# Altium PCB front pannel.PcbDoc
Units mm, origin at the board's own origin, x right, y up, seen from the top; angles counter-clockwise.
Board outline 79 x 33 mm, 2 copper layers (Top Layer, Bottom Layer); 28 components, 20 nets, 78 pads, 20 vias.
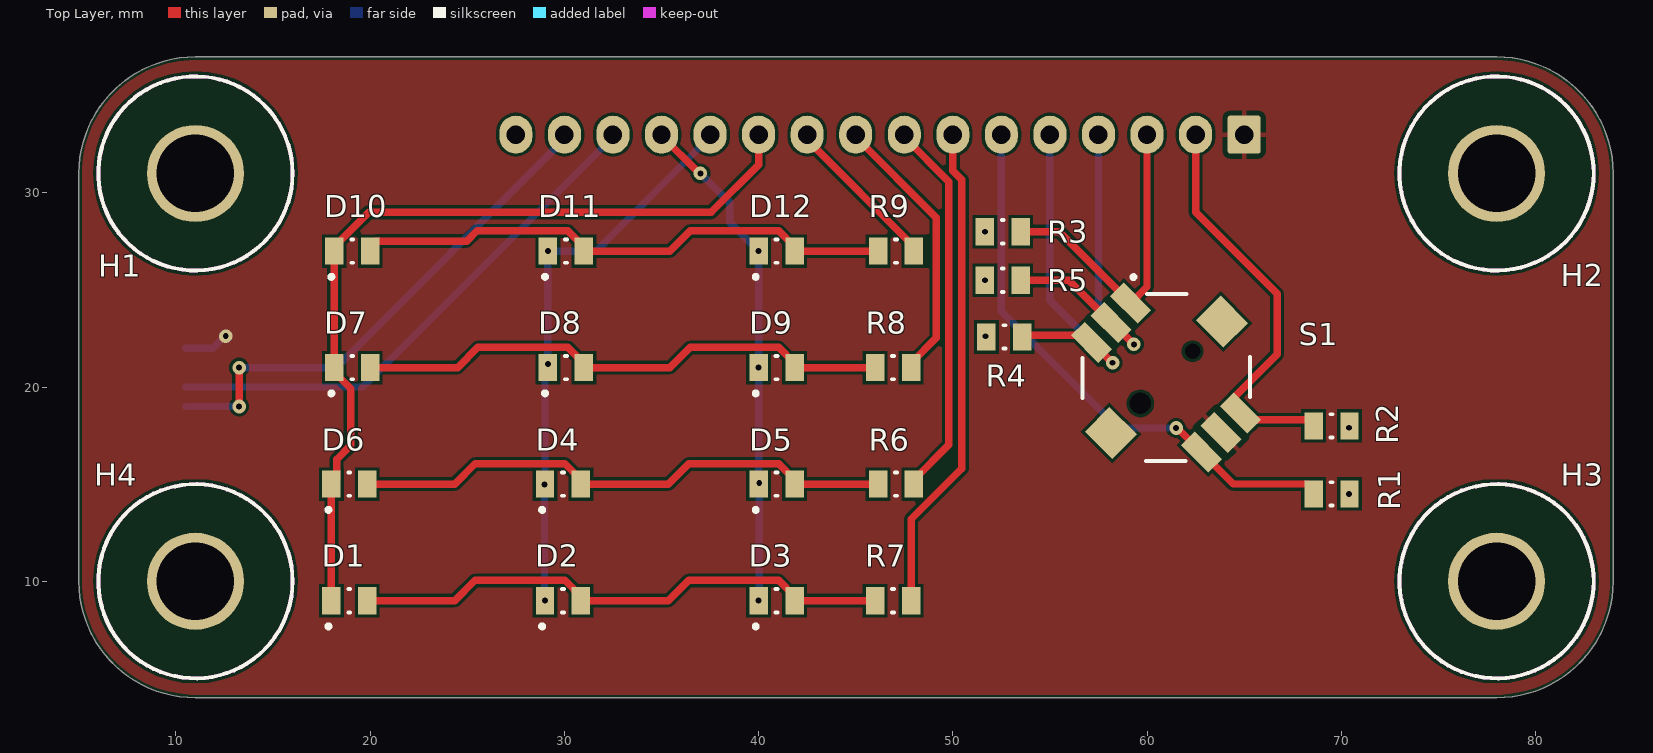
[diagram p0: Top Layer view]
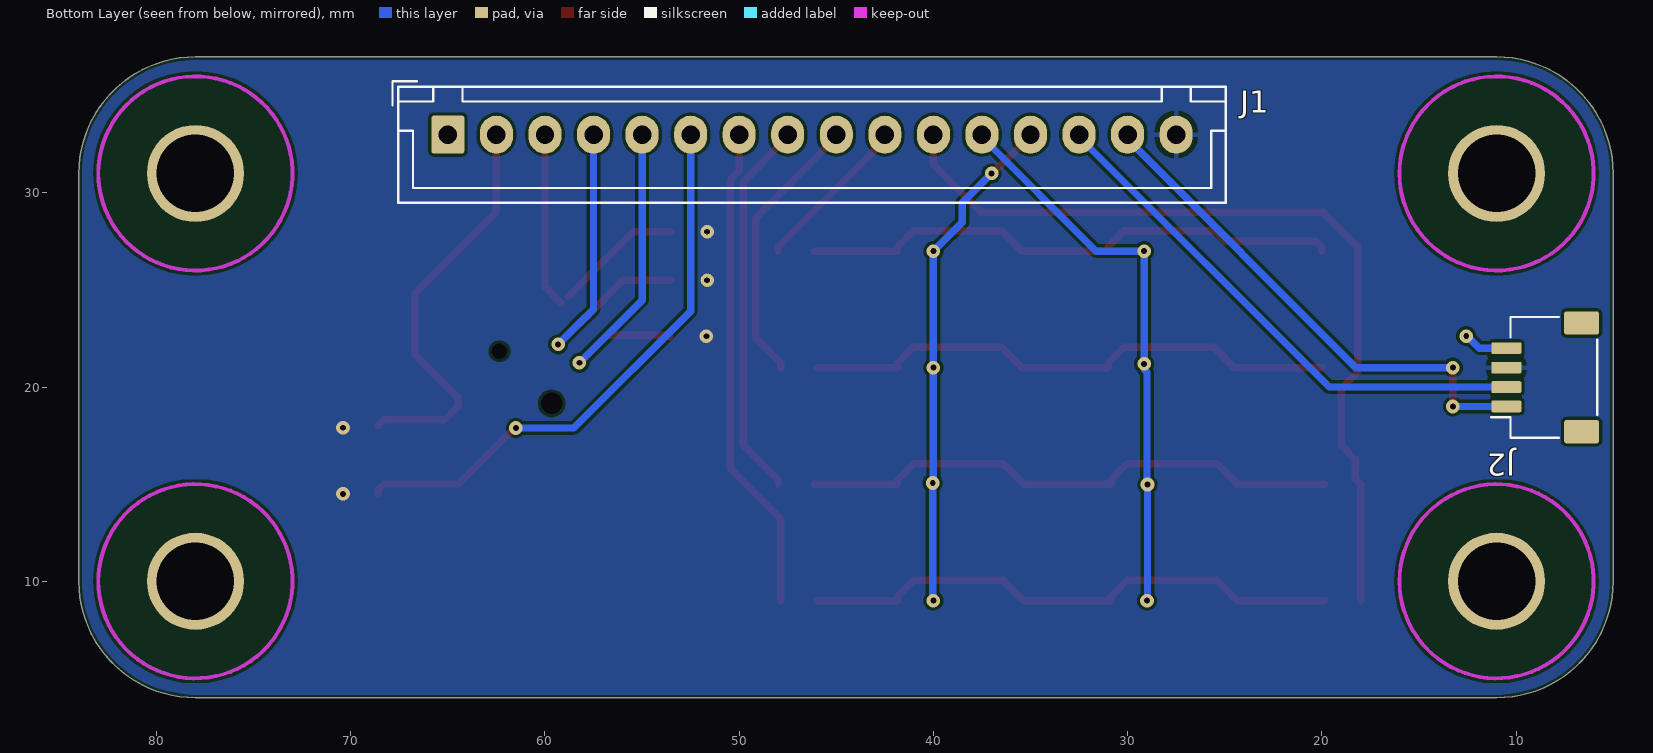
[diagram p1: Bottom Layer view, seen from below]
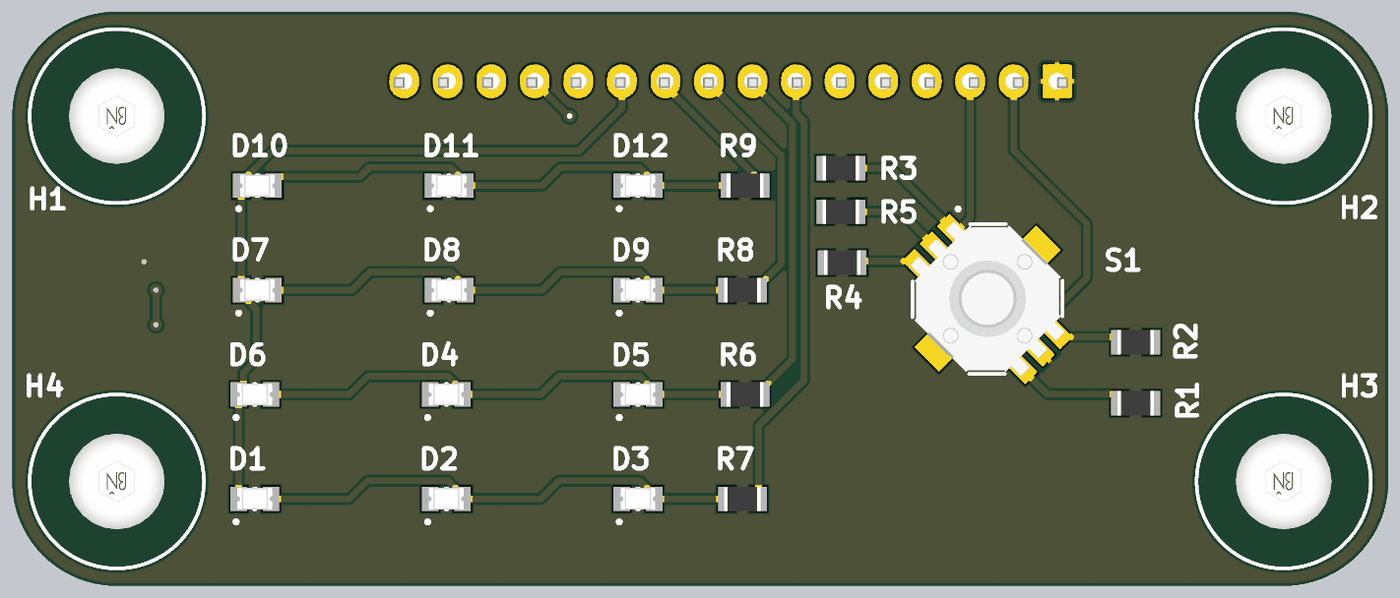
[diagram p2: 3D render of the assembled board from above, using the file's embedded part models]

## Layer stack, top to bottom
Top Solder: solder mask 0.0102, Solder Resist, Dk 3.5
Top Layer: signal copper 0.0356
Dielectric 1: dielectric 0.32, FR-4, Dk 4.8
Bottom Layer: signal copper 0.0356
Bottom Solder: solder mask 0.0102, Solder Resist, Dk 3.5

## Board outline
5,10 ccw(c11,10) 11,4 78,4 ccw(c78,10) 84,10 84,31 ccw(c78,31) 78,37 11,37 ccw(c11,31) 5,31

## Design rules (kind name [scope] priority, off if disabled: settings)
BoardOutlineClearance [All] p1: gap=0.152 ignorepadtopadclearanceinfootprint=FALSE
Clearance [All] p1: gap=0.152 ignorepadtopadclearanceinfootprint=FALSE
DiffPairsRouting [All] p1: maxlimit=1 minlimit=0.152 mostfreqgap=0.254 toplayer_minwidth=0.152 toplayer_maxwidth=1 toplayer_prefwidth=0.381 bottomlayer_minwidth=0.152 bottomlayer_maxwidth=1 bottomlayer_prefwidth=0.381 maxuncoupledlength=12.7
HoleSize [All] p1: absolutevalues=TRUE maxlimit=7 minlimit=0.152 maxpercent=80.000 minpercent=20.000
MatchedLengths [InDifferentialPair('No Differential Pair')] p1: tolerance=0.2 checknetsindiffpair=FALSE checkdiffpairvsdiffpair=TRUE checkxsignals=TRUE checkothers=TRUE usedelayunits=TRUE delaytolerance=0.200000
MinimumSolderMaskSliver [All] p1: minsoldermaskwidth=0.025
PlaneConnect [All] p1: pad.planeconnectstyle=Relief pad.reliefexpansion=0.508 pad.reliefentries=4 pad.reliefconductorwidth=0.254 pad.reliefairgap=0.254 via.planeconnectstyle=Direct via.reliefexpansion=0.508 via.reliefentries=4 via.reliefconductorwidth=0.254 via.reliefairgap=0.254
PolygonConnect [All] p1: thpad.connectstyle=Relief thpad.reliefconductorwidth=0.254 thpad.reliefentries=4 thpad.polygonreliefangle="90 Angle" thpad.airgapwidth=0.254 smdpad.connectstyle=Relief smdpad.reliefconductorwidth=0.254 smdpad.reliefentries=4 smdpad.polygonreliefangle="90 Angle" smdpad.airgapwidth=0.254 via.connectstyle=Direct via.reliefconductorwidth=0.254 via.reliefentries=4 via.polygonreliefangle="90 Angle" via.airgapwidth=0.254
RoomDefinition UI [InComponentClass('UI')] p1: confinementstyle=ConfineIn formatcopy=TRUE lockcomponents=FALSE outline 5,4 84,4 84,37 5,37
RoutingVias [All] p1: holewidth=0.711 width=1.27 viastyle="Through Hole" minholewidth=0.711 minwidth=1.27 maxholewidth=0.711 maxwidth=1.27 useviatemplates=TRUE viatemplateguid#1={DC58A582-7C59-410E-8266-1BA04F45C8D7} viatemplatename#1=30x70
SilkToSilkClearance [All] p1: silktosilkclearance=0.152
SilkToSolderMaskClearance [IsPad] p1: minsilkscreentomaskgap=0.025 clearancetoexposedcopper=TRUE
SolderMaskExpansion [All] p1: expansion=0.102 istentingtop=FALSE
Width Width_1 [All] p1: maxlimit=2.54 minlimit=0.152 preferedwidth=0.254
Width [All] p2: maxlimit=0.254 minlimit=0.254 preferedwidth=0.254
24 further rules are at their usual default settings.

## Components (designator, comment, footprint, x,y, rotation, side; value= is the part's Value field where it differs from the comment)
D1 "green" "0805 LED" 18.925,9 r0 top
D2 "red" "0805 LED" 29.925,9 r0 top
D3 "red" "0805 LED" 40.925,9 r0 top
D4 "red" "0805 LED" 29.925,15 r0 top
D5 "red" "0805 LED" 40.925,15 r0 top
D6 "green" "0805 LED" 18.925,15 r0 top
D7 "green" "0805 LED" 19.075,21 r0 top
D8 "red" "0805 LED" 30.075,21 r0 top
D9 "red" "0805 LED" 40.925,21 r0 top
D10 "green" "0805 LED" 19.075,27 r0 top
D11 "red" "0805 LED" 30.075,27 r0 top
D12 "red" "0805 LED" 40.925,27 r0 top
H1 "mounting hole" "M3 HOLE iso" 11,31 r0 top
H2 "mounting hole" "M3 HOLE iso" 78,31 r0 top
H3 "mounting hole" "M3 HOLE iso" 78,10 r0 top
H4 "mounting hole" "M3 HOLE iso" 11,10 r0 top
J1 "16-pin" JST_XH_B16B-XH-A_1x16_P2.50mm_Vertical 65,33 r180 bottom
J2 "4-pin" JST_SH_SM04B-SRSS-TB_1x04-1MP_P1.00mm_Horizontal 8.5,20.5 r90 bottom
R1 "10k" 0805 69.5,14.5 r180 top
R2 "10k" 0805 69.5,18 r180 top
R3 "10k" 0805 52.575,28 r0 top
R4 "10k" 0805 52.653,22.578 r0 top
R5 "10k" 0805 52.575,25.5 r0 top
R6 "390" 0805 47.075,15 r180 top
R7 "390" 0805 46.925,9 r180 top
R8 "390" 0805 46.925,21 r180 top
R9 "390" 0805 47.075,27 r180 top
S1 "nav_switch" NAV_SWITCH_SJ1400BFQ 61,20.5 r315 top

## Footprints (in the part's own frame and the unit in brackets; to place one, negate y for a bottom-side part, rotate by r counter-clockwise, add the part's x,y. Pads: shape width x height; smd on the part's side, far side on the other; paste and mask are expansions set on the pad)
0805 [mm] "Chip Resistor, 2-Leads, Body 2.00x1.25mm, IPC Medium Density"
  rect 0.95x1.4 smd: 1(-0.925,0) 2(0.925,0)
  silkscreen extent -0.05,-0.6 0.05,0.6, body extent -1.05,-0.7 1.05,0.7, height 0.6
"0805 LED" [mm] "Chip Resistor, 2-Leads, Body 2.00x1.25mm, IPC Medium Density"
  rect 0.95x1.4 smd: 1(-0.925,0) 2(0.925,0)
  silkscreen extent -1.18,-1.43 0.05,0.6, body extent -1,-0.62 1,0.62, height 0.8
JST_SH_SM04B-SRSS-TB_1x04-1MP_P1.00mm_Horizontal [mm]
  rrect25% 0.6x1.55 smd: 1(-1.5,2) 2(-0.5,2) 3(0.5,2) 4(1.5,2)
  rrect21% 1.2x1.8 smd: MP(-2.8,-1.875) MP(2.8,-1.875)
  silkscreen extent -3.11,-2.69 3.11,2.78, body extent -3,-2.54 3,2.41, height 2.9
JST_XH_B16B-XH-A_1x16_P2.50mm_Vertical [mm]
  rrect15% 1.7x1.95 hole 0.95: 1(0,0)
  rrect100% 1.7x1.95 hole 0.95: 2(2.5,0) 3(5,0) 4(7.5,0) 5(10,0) 6(12.5,0) 7(15,0) 8(17.5,0) 9(20,0) 10(22.5,0) 11(25,0) 12(27.5,0) 13(30,0) 14(32.5,0) 15(35,0) 16(37.5,0)
  silkscreen extent -2.85,-3.51 40.06,2.75, body extent -2.64,-3.43 40.13,2.41, height 7.21
"M3 HOLE iso" [mm]
  round 5 hole 4 paste-6: 1(0,0)
  Keep-Out Layer circle w0.2: c0,0 r5
  silkscreen extent -5,-5 5,5, body extent -3.18,-2.75 3.18,2.75, height 1.5
NAV_SWITCH_SJ1400BFQ [mm]
  rect 2x1 smd paste-6: 1(-4,1.4) 2(-4,-0.025) 3(-4,-1.45) 4(4,1.4) 5(4,-0.025) 6(4,-1.45)
  round 0 hole 0.8 paste-6: 8(0,1.9)
  round 0 hole 1.1 paste-6: 9(0,-1.9)
  rect 2x1.8 smd paste-6: NC(0,4.05) NC(0,-4.05)
  silkscreen extent -4.95,-3.8 3.75,3.78, body extent -4.5,-3.9 4.5,3.9, height 4.99

## Part data
D1 D2 D3 D4 D5 D6 D7 D8 D9 D10 D11 D12: library part LED
R1 R2 R3 R4 R5 R6 R7 R8 R9: library part res0805

## Via types
v1: diameter 0.7, hole 0.3, Top Layer to Bottom Layer, 20 vias

## Nets (pads, with @x,y where several pads share a name; then routed paths per layer and width w, separated by ;. In a path a pad name is that pad's centre, name@x,y a point inside that pad or via, vN(x,y) a via of type N, cw(c..) or ccw(c..) an arc to the next point about the centre after c; other vN are vias at no path point)
+3.3V: J1.16 J2.3 R1.1 R2.1 R3.1 R4.1 R5.1 | length 0.2
  Top Layer w0.381: v1(70.4,14.5) R1.1 ; v1(70.4,17.9) 70.4,17.975 R2.1
  Bottom Layer w0.381: v1(51.65,25.5) 51.65,25.484 v1@51.658,25.475
  other v1: 51.689,22.618 51.65,28
GND: J1.1 J2.4 S1.5 | length 2.3
  Bottom Layer w0.381: J2.4 11.886,22 12.51,22.624 v1(12.565,22.624)
NetD1_1: D1.1 D6.1 D7.1 D10.1 J1.11 | length 44.1
  Top Layer w0.381: D1.1 D6.1 18.272,15.272 18.272,16.272 19,17 19,19.925 18.15,20.775 D7.1 D10.1 18.15,27.225 19.925,29 37.552,29 40,31.448 J1.11
NetD1_2: D1.2 D2.2 D3.2 R7.2 | length 28.1
  Top Layer w0.381: D1.2 24.354,9 25.397,10.043 30.032,10.043 30.85,9.225 D2.2 35.354,9 36.397,10.043 41.032,10.043 41.85,9.225 D3.2 R7.2
NetD2_1: D2.1 D4.1 D8.1 D11.1 J1.12 | length 29
  Bottom Layer w0.381: v1(29,9) 28.974,9.026 v1(28.974,14.979) 29,15.005 29,20.764 29.15,20.914 v1(29.15,21.193) v1(29.15,27) 31.625,27 37.5,32.875 J1.12
NetD3_1: D3.1 D5.1 D9.1 D12.1 J1.13 | length 26.6
  Top Layer w0.381: J1.13 35,32.938 36.937,31 v1(37,31)
  Bottom Layer w0.381: J1.13@35,32.586 J1.13 ; v1(37,31) 38.515,29.485 38.515,28.485 v1(40,27) v1(40,21) 40,15.094 v1(40.036,15.058) 40.036,9.036 v1(40,9)
NetD4_2: D4.2 D5.2 D6.2 R6.2 | length 28.3
  Top Layer w0.381: D6.2 24.354,15 25.397,16.043 30.032,16.043 30.85,15.225 D4.2 35.354,15 36.397,16.043 41.032,16.043 41.85,15.225 D5.2 R6.2
NetD7_2: D7.2 D8.2 D9.2 R8.2 | length 28
  Top Layer w0.381: D7.2 24.504,21 25.547,22.043 30.182,22.043 31,21.225 D8.2 35.429,21 36.472,22.043 41.032,22.043 41.85,21.225 D9.2 R8.2
NetD10_2: D10.2 D11.2 D12.2 R9.2 | length 28.3
  Top Layer w0.381: D10.2 20,27.225 20.284,27.51 24.967,27.51 25.5,28.043 30.182,28.043 31,27.225 D11.2 35.429,27 36.472,28.043 41.032,28.043 41.85,27.225 D12.2 R9.2
NetJ1_2: J1.2 R2.2 S1.4 | length 21.2
  Top Layer w0.381: J1.2 62.5,29 66.7,24.8 66.7,21.688 64.465,19.453 64.465,19.015 S1.4 65.172,18.308 68.29,18.308 68.575,18.023 R2.2
NetJ1_3: J1.3 R3.2 S1.1 | length 15.7
  Top Layer w0.381: R3.2 55.48,28 S1.1@58.808,24.672 ; S1.1 60,25.157 J1.3
NetJ1_4: J1.4 R5.2 S1.2 | length 18.8
  Top Layer w0.381: R5.2 55.965,25.5 S1.2 58.214,23.311 v1(59.326,22.198)
  Bottom Layer w0.381: J1.4 57.5,24 57.9,23.6 57.924,23.6 v1(59.326,22.198)
NetJ1_5: J1.5 R4.2 S1.3 | length 18.3
  Top Layer w0.381: R4.2 53.657,22.657 56.806,22.657 58.212,21.25 v1(58.225,21.25)
  Bottom Layer w0.381: J1.5 55,24.475 v1(58.225,21.25)
NetJ1_6: J1.6 R1.2 S1.6 | length 29.2
  Top Layer w0.381: v1(61.497,17.889) 61.561,17.889 S1.6 64.44,15.01 68.29,15.01 68.575,14.725 R1.2
  Bottom Layer w0.381: J1.6 52.5,23.9 58.511,17.889 v1(61.497,17.889)
NetJ1_7: J1.7 R7.1 | length 25.3
  Top Layer w0.381: R7.1 47.85,13.19 50.462,15.802 50.462,30.667 50,31.129 J1.7
NetJ1_8: J1.8 R6.1 | length 19.7
  Top Layer w0.381: J1.8 47.5,32.875 49.8,30.575 49.8,17.025 48,15.225 R6.1
NetJ1_9: J1.9 R8.1 | length 14.3
  Top Layer w0.381: J1.9 45,32.875 49.154,28.721 49.154,22.529 47.85,21.225 R8.1
NetJ1_10: J1.10 R9.1 | length 8.3
  Top Layer w0.381: J1.10 42.5,32.725 48,27.225 R9.1
NetJ1_14: J1.14 J2.2 | length 27.5
  Bottom Layer w0.381: J2.2 19.625,20 32.5,32.875 J1.14
NetJ1_15: J1.15 J2.1 | length 26.6
  Top Layer w0.381: v1(13.25,19) v1(13.25,21)
  Bottom Layer w0.381: J2.1 v1(13.25,19) ; v1(13.25,21) 18.25,21 30,32.75 J1.15
pads on no net: H1.1 H2.1 H3.1 H4.1 J2.MP S1.8 S1.9 S1.NC

## Polygon pours and split planes (outlines as drawn)
GND on Top Layer "NONET_L02_P-001" (solid, remove dead copper, pour order 0): 5,37 84,37 84,4 5,4
+3.3V on Bottom Layer "NONET_L02_P-001" (solid, remove dead copper, pour order 1): 5,37 84,37 84,4 5,4

## Silkscreen, mask and mechanical layers (free items; w line width, h text height)
Mechanical 1:
  the board outline again, w0.2

## Text inside footprints (layer, text, board x,y; h text height)
J1: Mechanical 6 "%R" at 46.643,30.007 h1
J2: Mechanical 6 "%R" at 8.207,20.107 h1 r270